# Altium PCB Краморенко.pcbdoc
Units mm, origin at the board's own origin, x right, y up, seen from the top; angles counter-clockwise.
Board outline 71 x 45 mm, 2 copper layers (Top Layer, Bottom Layer); 32 components, 17 nets, 128 pads, 8 vias.
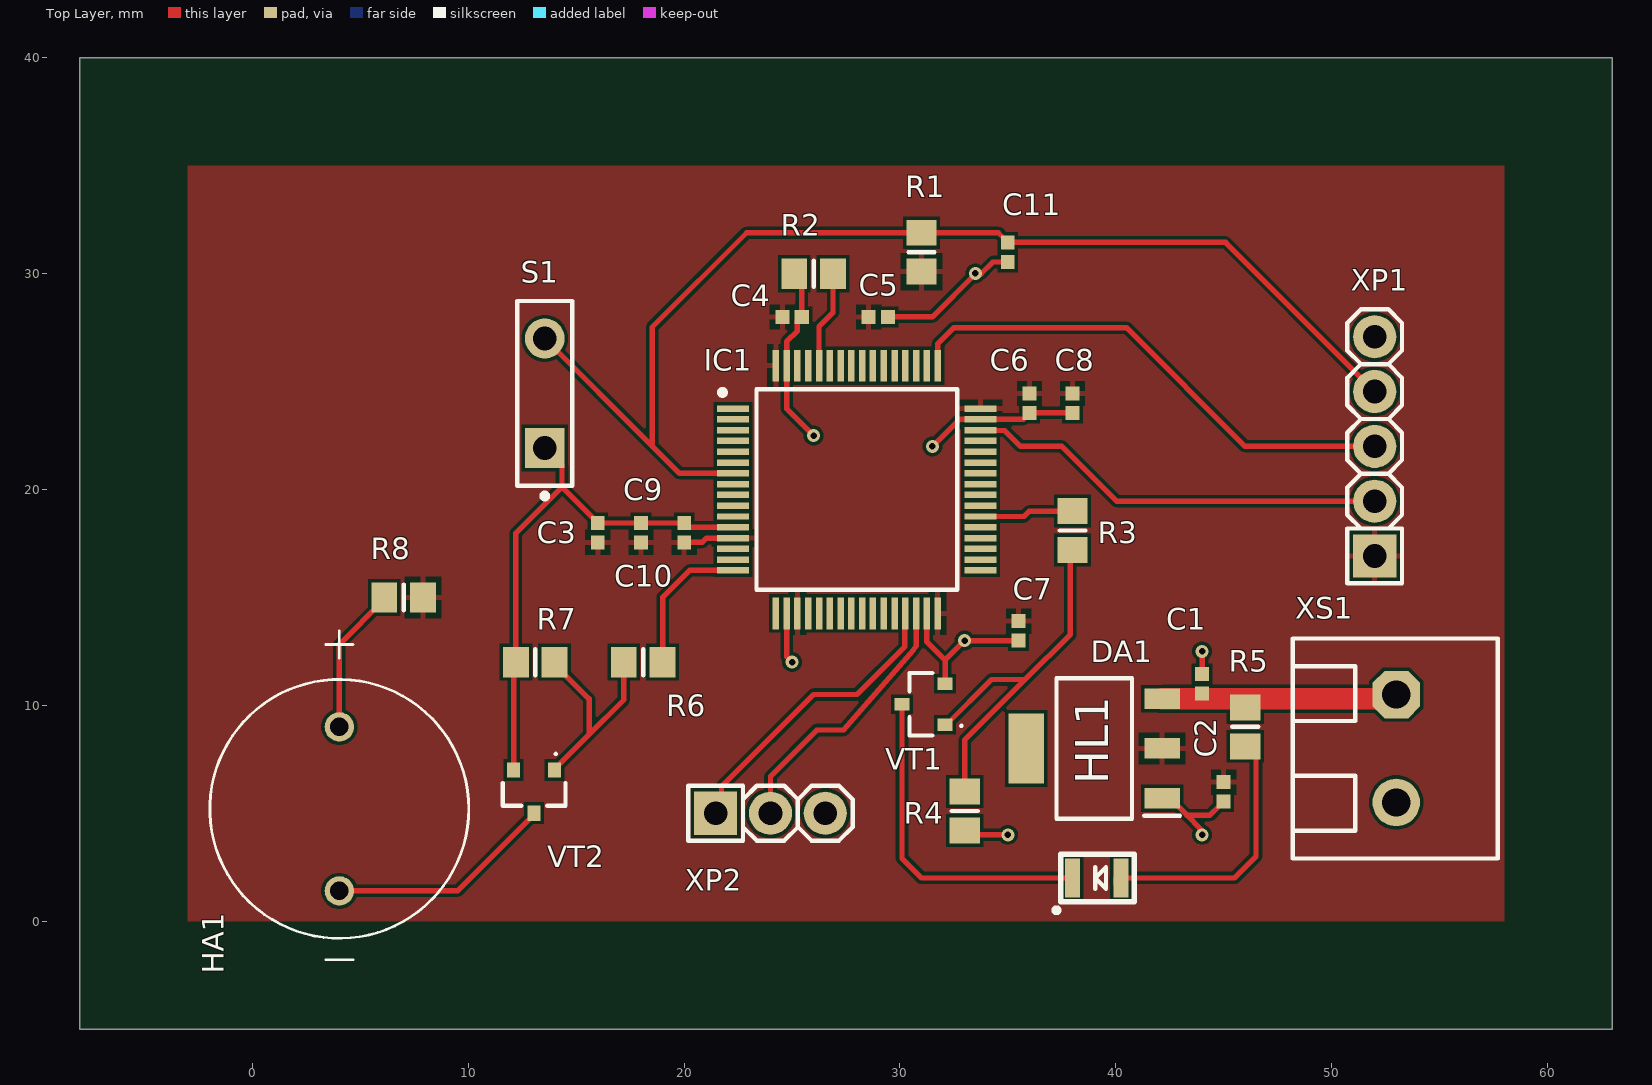
[diagram p0: Top Layer view]
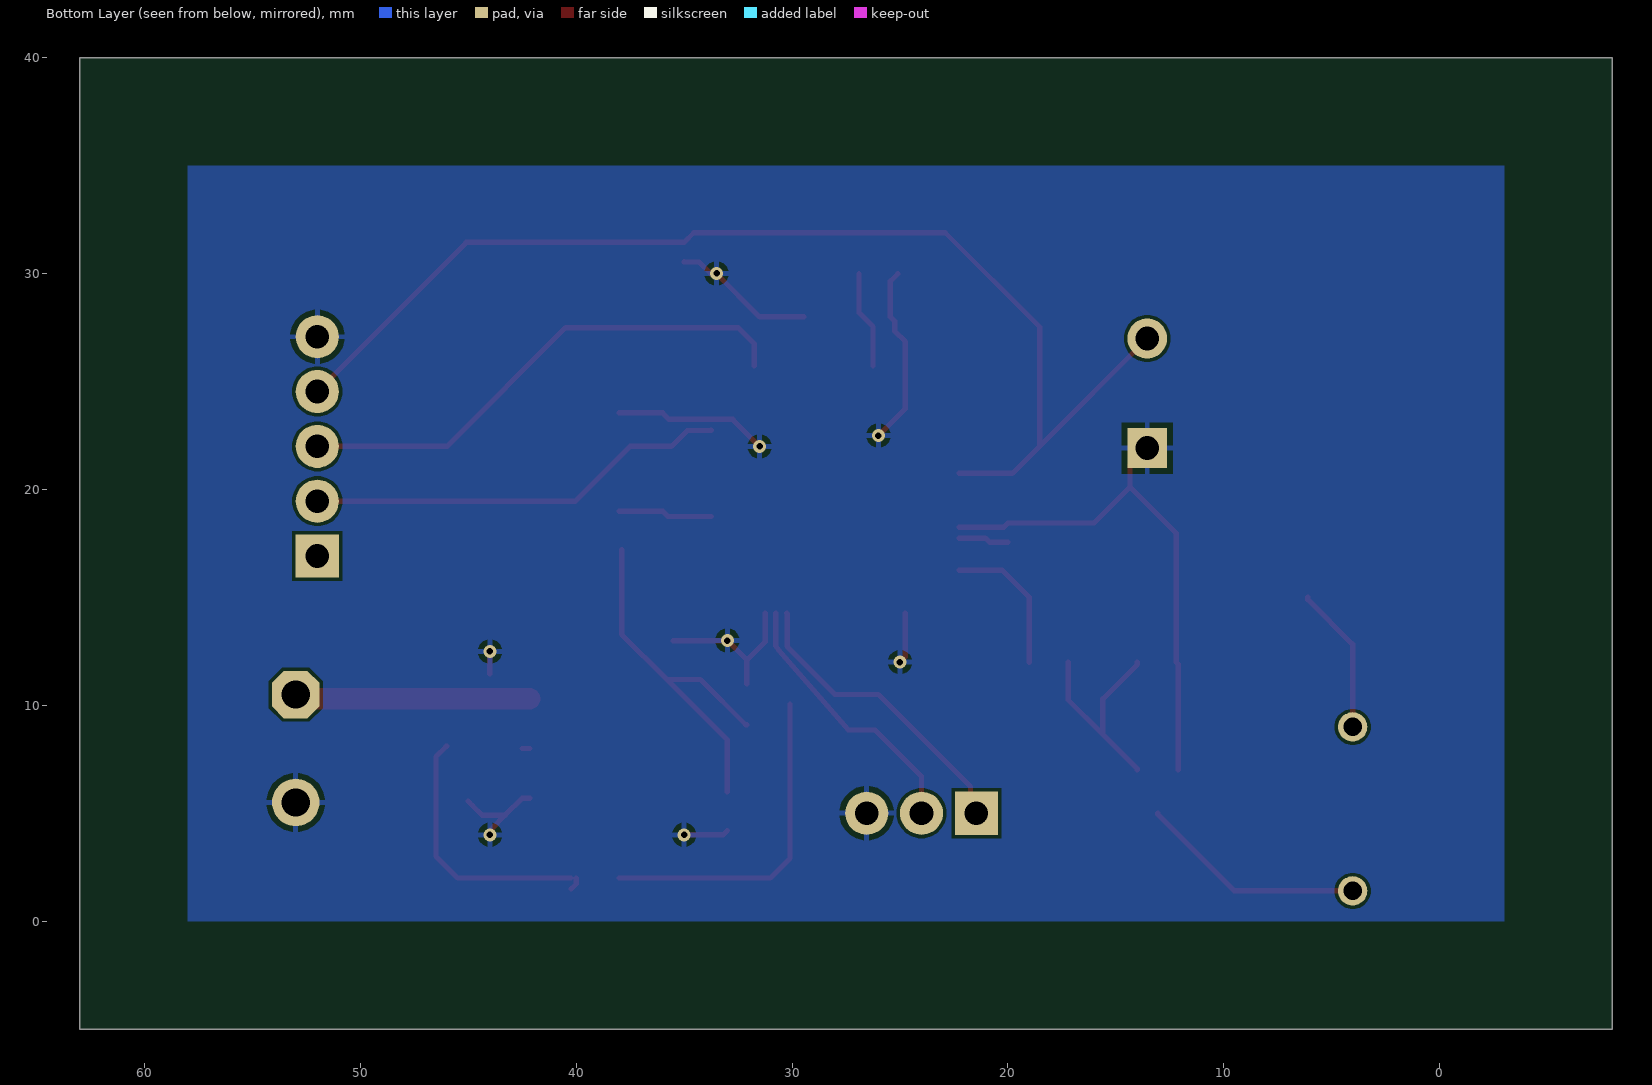
[diagram p1: Bottom Layer view, seen from below]

## Layer stack, top to bottom
Top Solder: solder mask 0.0102, Solder Resist, Dk 3.5
Top Layer: signal copper 0.0356
Dielectric 1: dielectric 0.32, FR-4, Dk 4.8
Bottom Layer: signal copper 0.0356
Bottom Solder: solder mask 0.0102, Solder Resist, Dk 3.5

## Board outline
-8,-5 -8,40 63,40 63,-5

## Design rules (kind name [scope] priority, off if disabled: settings)
Clearance [All] p1: gap=0.15 ignorepadtopadclearanceinfootprint=FALSE except(0: Arc-Hole Track-Hole SMDPad-Hole THPad-Hole Via-Hole Fill-Hole Poly-Hole Region-Hole Text-Hole)
DiffPairsRouting [All] p1: maxlimit=0.254 minlimit=0.15 mostfreqgap=0.15 toplayer_minwidth=0.15 toplayer_maxwidth=0.381 toplayer_prefwidth=0.15 bottomlayer_minwidth=0.15 bottomlayer_maxwidth=0.381 bottomlayer_prefwidth=0.15 maxuncoupledlength=12.7
MinimumSolderMaskSliver [All] p1: minsoldermaskwidth=0.15
PolygonConnect [All] p1: connectstyle=Relief reliefconductorwidth=0.254 reliefentries=4 polygonreliefangle="90 Angle" airgapwidth=0.254
RoutingVias [All] p1: holewidth=0.3 width=0.6 viastyle="Through Hole" minholewidth=0.3 minwidth=0.6 maxholewidth=0.3 maxwidth=0.6
SilkToSolderMaskClearance [IsText] p1: minsilkscreentomaskgap=0.254 clearancetoexposedcopper=TRUE
SolderMaskExpansion [All] p1: expansion=0.102 istentingtop=FALSE
Width [All] p1: maxlimit=1 minlimit=0.25 preferedwidth=0.25
27 further rules are at their usual default settings.

## Classes and differential pairs
component class kursach_6_sem: C1 C2 C3 C4 C5 C6 C7 C8 C9 C10 C11 DA1 HA1 HL1 IC1 R1 R2 R3 R4 R5 R6 R7 R8 S1 VT1 VT2 XP1 XP2 XS1

## Components (designator, comment, footprint, x,y, rotation, side; value= is the part's Value field where it differs from the comment)
C1 "100нФ" CAPC1005X56N 44,11 r90 top
C2 "10мкФ" CAPC1005X56N 45,5.996 r90 top
C3 "100нФ" CAPC1005X56N 16,18 r270 top
C4 "100нФ" CAPC1005X56N 25,28 r180 top
C5 "100нФ" CAPC1005X56N 29,28 r180 top
C6 "100нФ" CAPC1005X56N 36,24 r90 top
C7 "100нФ" CAPC1005X56N 35.499,13.45 r90 top
C8 "4.7мкФ" CAPC1005X56N 38,24 r90 top
C9 "10нФ" CAPC1005X56N 18,18 r90 top
C10 "1мкФ" CAPC1005X56N 20,18 r90 top
C11 "0.1мкФ" CAPC1005X56N 35,31 r90 top
DA1 "LD1117AS33TR" LD1117AS33TR 39.001,8 r180 top
HA1 "" XDCR_AI-1223-TWT-12V-R 4.021,5.2 r0 top
HL1 "LED_1206" LED_1206 40.25,2 r180 top
IC1 "STM32F103RBT6TR" STM32F103RBT6TR 28,20 r0 top
R1 "40k" "RES: 0805" 31,31 r90 top
R2 "40k" "RES: 0805" 26,30 r180 top
R3 "2.4k" "RES: 0805" 38,18.1 r270 top
R4 "40k" "RES: 0805" 33,5.1 r90 top
R5 "150" "RES: 0805" 46,9 r270 top
R6 "24k" "RES: 0805" 18.1,12 r0 top
R7 "8.2k" "RES: 0805" 13.1,12 r180 top
R8 "180" "RES: 0805" 7,15 r0 top
S1 "Button SW-SPST" SPST-2 13.54,24.46 r90 top
VT1 "BC847" BC847215 31.096,10.05 r90 top
VT2 "BC847,215" BC847215 13.05,6 r180 top
XP1 "Connector, 5pin, 2.54mm, 500VAC, 3A" "CON: PLS-5" 52,22 r90 top
XP2 "Connector, 3pin, 2.54mm, 500VAC, 3A" "CON: PLS-3" 24,5 r0 top
XS1 "Terminal connector, 2pin, 3.5mm, 300VAC, 10A" "CON: 0395430002 (5 mm)" 53,8 r270 top
ZBOAS157490157 "Слой 2" "BOASVIEWlayer:Bottom Layer:2:1:32:1" 0,2255 r0 top (schematic designator fewf)
ZBOAS157495669 "Слой 1" "BOASVIEWlayer:Top Layer:2:1:1:1" 0,2395 r0 top (schematic designator fewf)
ZBOAS856298622 "Comment" "BOASVIEWdrill:Таблица отверстий:0:0:0:0" 177.5,2470 r0 top

## Footprints (in the part's own frame and the unit in brackets; to place one, negate y for a bottom-side part, rotate by r counter-clockwise, add the part's x,y. Pads: shape width x height; smd on the part's side, far side on the other; paste and mask are expansions set on the pad)
BC847215 [mm]
  rect 0.6x0.7 smd: 1(-0.95,-1) 2(0.95,-1) 3(0,1)
  silkscreen extent -1.45,-1.8 1.45,0.65, body extent -1.45,-1.2 1.45,1.2, height 0.95
"BOASVIEWdrill:Таблица отверстий:0:0:0:0" [mm]
"BOASVIEWlayer:Bottom Layer:2:1:32:1" [mm]
"BOASVIEWlayer:Top Layer:2:1:1:1" [mm]
CAPC1005X56N [mm]
  rect 0.65x0.64 smd: 1(-0.45,0) 2(0.45,0)
  body extent -0.5,-0.25 0.5,0.25, height 0.56
"CON: 0395430002 (5 mm)" [mm] "2 pin 5.08mm screw connector"
  oct 2.2x2.2 hole 1.3: 1(-2.5,0)
  round 2.2 hole 1.3: 2(2.5,0)
  silkscreen extent -5.1,-4.8 5.1,4.7, body extent -5,-4.8 5,4.6, height 14.63
"CON: PLS-3" [mm]
  rect 2x2 hole 1.1: 1(-2.54,0)
  round 2 hole 1.1: 2(0,0) 3(2.54,0)
  silkscreen extent -3.81,-1.27 3.81,1.27, body extent -3.81,-1.27 3.81,1.27, height 8.54
"CON: PLS-5" [mm]
  rect 2x2 hole 1.1: 1(-5.08,0)
  round 2 hole 1.1: 2(-2.54,0) 3(0,0) 4(2.54,0) 5(5.08,0)
  silkscreen extent -6.35,-1.27 6.35,1.27, body extent -6.35,-1.27 6.35,1.27, height 8.54
LD1117AS33TR [mm]
  rect 1.65x0.95 smd: 1(-3.15,2.3) 2(-3.15,0) 3(-3.15,-2.3)
  rect 1.65x3.25 smd: 4(3.15,0)
  silkscreen extent -3.98,-3.25 1.75,3.25, body extent -3.5,-3.25 3.5,3.25, height 1.9
LED_1206 [mm]
  rect 0.7x1.8 smd: 1(0,0) 2(2.25,0)
  silkscreen extent -0.6,-1.1 3.1,1.6
"RES: 0805" [mm] "Chip Resistor, Body 2.0x1.2mm, IPC Medium Density"
  rect 1.2x1.4 smd: 1(-0.9,0) 2(0.9,0)
  silkscreen extent 0,-0.6 0,0.6, body extent -1.07,-0.7 1.07,0.7, height 0.7
SPST-2 [mm] "Switch; 2 Leads"
  rect 1.85x1.85 hole 1.1: 1(-2.54,0)
  round 1.85 hole 1.1: 2(2.54,0)
  silkscreen extent -4.89,-1.27 4.28,1.27
STM32F103RBT6TR [mm]
  rect 1.475x0.3 smd: 1(-5.738,3.75) 2(-5.738,3.25) 3(-5.738,2.75) 4(-5.738,2.25) 5(-5.738,1.75) 6(-5.738,1.25) 7(-5.738,0.75) 8(-5.738,0.25) 9(-5.738,-0.25) 10(-5.738,-0.75) 11(-5.738,-1.25) 12(-5.738,-1.75) 13(-5.738,-2.25) 14(-5.738,-2.75) 15(-5.738,-3.25) 16(-5.738,-3.75) 33(5.738,-3.75) 34(5.738,-3.25) 35(5.738,-2.75) 36(5.738,-2.25) 37(5.738,-1.75) 38(5.738,-1.25) 39(5.738,-0.75) 40(5.738,-0.25) 41(5.738,0.25) 42(5.738,0.75) 43(5.738,1.25) 44(5.738,1.75) 45(5.738,2.25) 46(5.738,2.75) 47(5.738,3.25) 48(5.738,3.75)
  rect 0.3x1.475 smd: 17(-3.75,-5.738) 18(-3.25,-5.738) 19(-2.75,-5.738) 20(-2.25,-5.738) 21(-1.75,-5.738) 22(-1.25,-5.738) 23(-0.75,-5.738) 24(-0.25,-5.738) 25(0.25,-5.738) 26(0.75,-5.738) 27(1.25,-5.738) 28(1.75,-5.738) 29(2.25,-5.738) 30(2.75,-5.738) 31(3.25,-5.738) 32(3.75,-5.738) 49(3.75,5.738) 50(3.25,5.738) 51(2.75,5.738) 52(2.25,5.738) 53(1.75,5.738) 54(1.25,5.738) 55(0.75,5.738) 56(0.25,5.738) 57(-0.25,5.738) 58(-0.75,5.738) 59(-1.25,5.738) 60(-1.75,5.738) 61(-2.25,5.738) 62(-2.75,5.738) 63(-3.25,5.738) 64(-3.75,5.738)
  silkscreen extent -6.35,-4.65 4.65,4.65, body extent -6,-6 6,6, height 1.6
XDCR_AI-1223-TWT-12V-R [mm]
  round 1.358 hole 0.85: N(0,-3.8) P(0,3.8)
  silkscreen extent -6,-6.98 6,8.25, body extent -6,-6 6,7.44, height 10.05

## Part data
C1 C2 C3 C4 C5 C6 C7 C8 C9 C10 C11: library part 0402YC104MAT2A, "Capacitor", Manufacturer_Name=AVX, Mouser Part Number=581-0402YC104MAT2A, Datasheet Link=http://www.mouser.com/catalog/supplier/library/pdf/AVXSurfaceMountCeramic.pdf, Height=0.56mm, Manufacturer_Part_Number=0402YC104MAT2A, Mouser Price/Stock=https://www.mouser.co.uk/ProductDetail/AVX/0402YC104MAT2A?qs=O2%2FeDh0sX9yiCaLwpXy1bw%3D%3D
DA1: "Power Supply", Manufacturer_Name=STMicroelectronics, Mouser Part Number=511-LD1117AS33, Arrow Part Number=LD1117AS33TR, Arrow Price/Stock=https://www.arrow.com/en/products/ld1117as33tr/stmicroelectronics?region=europe, Datasheet Link=https://4donline.ihs.com/images/VipMasterIC/IC/SGST/SGSTS49356/SGSTS49356-1.pdf?hkey=6D3A4C79FDBF58556ACFDE234799DDF0, Height=1.9mm, Manufacturer_Part_Number=LD1117AS33TR, Mouser Price/Stock=https://www.mouser.co.uk/ProductDetail/STMicroelectronics/LD1117AS33TR?qs=C3bf%2FVrkE5CoDDd7wyn%252BaQ%3D%3D
HA1: library part Buzzer
IC1: "Integrated Circuit", Manufacturer_Name=STMicroelectronics, Mouser Part Number=511-STM32F103RBT6TR, Arrow Part Number=STM32F103RBT6TR, Arrow Price/Stock=https://www.arrow.com/en/products/stm32f103rbt6tr/stmicroelectronics?region=nac, Datasheet Link=https://www.st.com/resource/en/datasheet/stm32f103c8.pdf, Height=1.6mm, Manufacturer_Part_Number=STM32F103RBT6TR, Mouser Price/Stock=https://www.mouser.co.uk/ProductDetail/STMicroelectronics/STM32F103RBT6TR?qs=5HwTSiuA5HDVUOusqeQ5hQ%3D%3D
R1 R2 R3 R4 R5 R6 R7 R8: library part "2. Resistor SMD"
S1: "Single-Pole, Single-Throw Switch", LatestRevisionDate=17-Jul-2002, LatestRevisionNote="Re-released for DXP Platform.", PackageDescription="Switch; 2 Leads", PackageReference=SPST-2, Published=24-Mar-1999, Publisher="Altium Limited"
VT1: library part BC847,215, "Transistor BJT NPN", Manufacturer_Name=Nexperia, Mouser Part Number=771-BC847215, Arrow Part Number=BC847,215, Arrow Price/Stock=https://www.arrow.com/en/products/bc847215/nexperia?region=nac, Datasheet Link=https://assets.nexperia.com/documents/data-sheet/BC847_SER.pdf, Height=1.1mm, Manufacturer_Part_Number=BC847,215, Mouser Price/Stock=https://www.mouser.co.uk/ProductDetail/Nexperia/BC847215?qs=me8TqzrmIYWROhdFmDauyQ%3D%3D
VT2: "Transistor BJT NPN", Manufacturer_Name=Nexperia, Mouser Part Number=771-BC847215, Arrow Part Number=BC847,215, Arrow Price/Stock=https://www.arrow.com/en/products/bc847215/nexperia?region=nac, Datasheet Link=https://assets.nexperia.com/documents/data-sheet/BC847_SER.pdf, Height=1.1mm, Manufacturer_Part_Number=BC847,215, Mouser Price/Stock=https://www.mouser.co.uk/ProductDetail/Nexperia/BC847215?qs=me8TqzrmIYWROhdFmDauyQ%3D%3D
XP1: library part PLS-5, CurrentMax=3A, Manufacturer=Connfly, VoltageMax=500VAC, CommentText="\"Разъем\"", HelpURL=https://www.chipdip.ru/product/pls-5, Multichannel=5pin, PartNumber=PLS-5, Pitch=2.54mm, TypeConnector=Connector, ValueManufacturerPartNumber="Connector, 5pin, 2.54mm, 500VAC, 3A"
XP2: library part PLS-3, CurrentMax=3A, Manufacturer=Connfly, VoltageMax=500VAC, CommentText="\"Разъем\"", HelpURL=https://www.chipdip.ru/product/pls-3, Multichannel=3pin, PartNumber=PLS-3, Pitch=2.54mm, TypeConnector=Connector, ValueManufacturerPartNumber="Connector, 3pin, 2.54mm, 500VAC, 3A"
XS1: library part 12.Connector_terminal_5.08mmx2pin, CurrentMax=10A, Manufacturer=Degson, PartNumber=DG350-3.5-02P-14, VoltageMax=300VAC, CommentText="\"Разъем\"", HelpURL=https://www.chipdip.ru/product/dg350-3.5-02p-12, Multichannel=2pin, Pitch=3.5mm, TypeConnector="Terminal connector", ValueManufacturerPartNumber="Terminal connector, 2pin, 3.5mm, 300VAC, 10A"

## Via types
v1: diameter 0.6, hole 0.3, Top Layer to Bottom Layer, 8 vias

## Nets (pads, with @x,y where several pads share a name; then routed paths per layer and width w, separated by ;. In a path a pad name is that pad's centre, name@x,y a point inside that pad or via, vN(x,y) a via of type N, cw(c..) or ccw(c..) an arc to the next point about the centre after c; other vN are vias at no path point)
+3.3: C2.2 C3.2 C4.2 C5.2 C6.2 C7.2 C8.2 C9.1 C10.1 DA1.2 IC1.13 IC1.19 IC1.32 IC1.48 IC1.64 R1.1 R8.2 XP1.1 | length 2.7
  Top Layer w0.25: C10.1 20.835,17.55 21.035,17.75 IC1.13 ; DA1.2 DA1.2@42.501,8
+5: C1.1 DA1.3 R5.1 XS1.1 | length 10.9
  Top Layer w0.25: XS1.1@52.8,10.3 XS1.1
  Top Layer w1: DA1.3 44,10.3 46,10.3 XS1.1@52.8,10.3
GND: C1.2 C2.1 C3.1 C4.1 C5.1 C6.1 C7.1 C8.1 C9.2 C10.2 C11.1 DA1.1 IC1.12 IC1.18 IC1.31 IC1.47 IC1.63 R2.2 R4.1 R7.2 S1.1 VT1.2 VT2.2 XP1.5 XP2.3 XS1.2 | length 64.6
  Top Layer w0.25: VT2.2 12.1,11.9 R7.2 12.2,17.975 14.34,20.115 ; S1.1 14.34,21.12 14.34,20.115 ; IC1.12 20.195,18.25 20,18.445 C10.2 C9.2 C3.1 16,18.455 14.34,20.115 ; IC1.18 24.75,12.25 v1(25,12) ; R2.2 25.45,29.65 C4.1 ; C4.1@25.445,28 25.25,27.805 25.25,27.351 24.75,26.851 IC1.63 24.75,23.75 v1(26,22.5) ; C5.1 31.5,28 v1@33.5,30 ; IC1.31 31.25,12.941 32.096,12.096 ; v1(31.5,22) 32.75,23.25 IC1.47 35.705,23.25 36,23.545 C6.1 C8.1 ; VT1.2 32.096,12.096 ; R4.1 33.2,4 v1(35,4) ; v1(33.5,30.014) v1@33.5,30 ; C11.1 34.995,30.545 34.305,30.545 33.76,30 v1@33.5,30 ; C7.1 v1(33,13) 32.096,12.096 ; DA1.1 42.501,5.7 43.294,4.907 ; v1(44,4) 43.933,4.067 43.933,4.268 43.294,4.907 ; C1.2 v1(44,12.5) ; C2.1 45,5.541 44.805,5.346 44.8,5.346 44.361,4.907 43.294,4.907
NetC11_2: C11.2 IC1.7 R1.2 S1.2 XP1.4 | length 55.2
  Top Layer w0.25: S1.2 18.52,22.02 ; IC1.7 19.79,20.75 18.52,22.02 ; XP1.4 45.09,31.45 C11.2 35,31.455 34.555,31.9 R1.2 22.9,31.9 18.52,27.52 18.52,22.02
NetHA1_N: HA1.N VT2.3 | length 10.5
  Top Layer w0.25: HA1.N 9.5,1.4 13.05,4.95 VT2.3
NetHA1_P: HA1.P R8.1 | length 6.9
  Top Layer w0.25: HA1.P 4.021,12.821 6.1,14.9 R8.1
NetHL1_1: HL1.1 R5.2 | length 12.6
  Top Layer w0.25: HL1.1@40,2 40,1.725 HL1.1@40.225,1.5 ; HL1.1 45.5,2 46.5,3 46.5,7.625 46.025,8.1 R5.2
NetHL1_2: HL1.2 VT1.3 | length 15.4
  Top Layer w0.25: VT1.3 30.096,2.904 31,2 HL1.2
NetIC1_16: IC1.16 R6.2 | length 6.8
  Top Layer w0.25: R6.2 19,15 20.25,16.25 IC1.16
NetIC1_29: IC1.29 XP2.1 | length 14.1
  Top Layer w0.25: XP2.1 21.729,5.269 21.729,6.229 26,10.5 28,10.5 30.225,12.725 30.225,14.237 IC1.29
NetIC1_30: IC1.30 XP2.2 | length 12.6
  Top Layer w0.25: XP2.2 24,6.708 26.146,8.854 27.387,8.854 30.625,12.559 30.75,12.75 IC1.30
NetIC1_38: IC1.38 R3.1 | length 4.4
  Top Layer w0.25: IC1.38 35.75,18.75 36,19 R3.1
NetIC1_46: IC1.46 XP1.2 | length 19.6
  Top Layer w0.25: IC1.46 33.752,22.736 34.85,22.736 35.587,22 37.5,22 40.04,19.46 XP1.2
NetIC1_49: IC1.49 XP1.3 | length 23.9
  Top Layer w0.25: IC1.49 31.75,26.75 32.5,27.5 40.5,27.5 46,22 XP1.3
NetIC1_60: IC1.60 R2.1 | length 4.5
  Top Layer w0.25: IC1.60 26.25,27.55 26.9,28.2 R2.1
NetR3_2: R3.2 R4.2 VT1.1 | length 17.8
  Top Layer w0.25: VT1.1 32.146,9.1 34.241,11.195 35.805,11.195 ; R4.2 33,8.39 35.805,11.195 ; R3.2@37.9,17.2 37.9,13.29 35.805,11.195
NetR6_1: R6.1 R7.1 VT2.1 | length 10.3
  Top Layer w0.25: VT2.1 14,7.05 15.6,8.65 ; R7.1 14,11.9 15.6,10.3 15.6,8.65 ; R6.1 17.2,10.25 15.6,8.65
pads on no net: DA1.4 IC1.1 IC1.2 IC1.3 IC1.4 IC1.5 IC1.6 IC1.8 IC1.9 IC1.10 IC1.11 IC1.14 IC1.15 IC1.17 IC1.20 IC1.21 IC1.22 IC1.23 IC1.24 IC1.25 IC1.26 IC1.27 IC1.28 IC1.33 IC1.34 IC1.35 IC1.36 IC1.37 IC1.39 IC1.40 IC1.41 IC1.42 IC1.43 IC1.44 IC1.45 IC1.50 IC1.51 IC1.52 IC1.53 IC1.54 IC1.55 IC1.56 IC1.57 IC1.58 IC1.59 IC1.61 IC1.62

## Polygon pours and split planes (outlines as drawn)
GND on Bottom Layer "GND_L02_P003" (solid, pour order 3): -3,35 58,35 58,0 -3,0
+3.3 on Top Layer "+3.3_L01_P005" (solid, pour order 5): -3,35 58,35 58,0 -3,0

## Silkscreen, mask and mechanical layers (free items; w line width, h text height)
Mechanical 1:
  the board outline again, w0.254
Mechanical 7:
  text "BOASFORMAT|А3|1|0|883070867|165354330|1000000000|2:1|" at -40,2505 h0
  text "DimH|-47244094|0|62992126|984251969|-23622047|3937008|2||||js12|False|False|False|False" at 120,2465 h0
  text "DimV|0|-27559055|62992126|929133859|3937008|-13779528|2||||js12|False|False|False|False" at 120,2325 h0
  text "МГТУ им. Н.Э.Баумана" at 333.128,2223.758 h4.5
  text "Кафедра ИУ4" at 340.456,2218.873 h4.5
  text "Группа ИУ4-61Б" at 338.339,2214.639 h4.5
  text "SET2|Superlayer=MechanicalLayer7|Wsuperlayer=MechanicalLayer8|Layergrid=MechanicalLayer9|Werase=MechanicalLayer11|Layermark=MechanicalLayer12|Layerstamp=MechanicalLayer13|Thinline=0,18|Basicline=0,6|Gridline=0,18|Boardline=0,6|Contourpolygonline=0,6|PcbGridStep=2,5|PcbGridCleareanceAtView=0|PcbGridNumberEach=l2|PcbGridLineEach=l2|PcbGridCountSecondaryStrip=1|PcbGridEnabledStrip=True|PcbGridHorizontal90=False|PcbGridWhiteAreaBeforeText=True|PcbSignalGridEnabled=True|PcbSignalShowBukva=True|RealSignalLayerNames=False|PcbGridEnabledBothSide=False|PcbPolarGridEnabled=False|PcbPolarGridAngleStep=10|PcbPolarGridRadialStep=10|PcbPolarGridCenterPcbGrid=False|SilkShowPad=True|SilkViewName=Слой маркировки|SilkShowHole=True|SilkShowAxis=True|SilkShowBukva=True|SilkShowGrid=False|SolderShowGrid=False|SolderViewName=Слой маски|SolderShowAxis=False|SolderShowBukva=False|MainViewShowGrid=False|MainViewUseShapesDrill=False|ShowBukvaOnSboky=True|ShowBukvaViews=True|Density=2,2|CustomHoleSizeFactor=1|TableName=|RazrezWidth=100|RealLayerNames=False|RazrezShowBukva=False|RazrezBukva=В-В|Sher=Ra 12,5|Asstoplayer=MechanicalLayer1|Asstoplayer2=None|Assbottomlayer=MechanicalLayer2|Assbottomlayer2=None|AssMinDiameterHoles=2|AssDim=False|AssMech=False|AssSilk=False|AssComponentSilk=False|AssFreeSilk=False|AssSmdPads=False|AssGridEnable=False|Mirror=Horisontal|PcbGridFontSize=5|PcbGridCenterZero=False|TTStampDistance=12|MainFontSize=5|PolyShtrihEnable=True|RegionShtrihEnable=False|PolyStep=2|PcbDrillDrawingGridEnabled=False|PcbDrillDrawingViewName=Слой сверловки|PcbDrillDrawingShowBukva=False|PcbDrillDrawingShowAxis=False|PcbSignalLayersUseDrill=False|PcbSignalLayersUseShapesDrill=False|PcbSignalLayersShowAxis=False" at -40,-34.975 h0
  text "TT0012#11. Остальные технические требования по ОСТ 4Г О.070.014-75" at -40,-35 h0
  text "TT0011#10. Контроль оптико-визуальным методом при 16-ти кратном увеличении по ГОСТ 23752.1-92." at -40,-35 h0
  text "TT0010#9. Контроль функциональный ручным способом методом прозвонки по ГОСТ 23752.1-92." at -40,-35 h0
  text "TT0009#8. Промывка по ГОСТ Р 70798-2023 изопропиловым спиртом ГОСТ 9805-84." at -40,-35 h0
  text "TT0008#7. Финишное покрытие металлизированных поверхностей меди по ГОСТ 9.301-86 толщиной не менее 250 мкм c флюсом ЛТИ-120 ГОСТ 19250-73 и припоем ПОС-61 ГОСТ 21930-76." at -40,-35 h0
  text "TT0007#группа жесткости - 1." at -40,-35 h0
  text "TT0006#6. Плата должна соответствовать ГОСТ 23752-79," at -40,-35 h0
  text "TT0005#5. Параметры отверстий платы приведены в таблице." at -40,-35 h0
  text "TT0004#4. Класс точности платы - 1 по ГОСТ Р 53429-2009." at -40,-35 h0
  text "TT0003#3. Плату изготовить химическим негативным методом." at -40,-35 h0
  text "TT0002#2. Шаг координатной сетки 2,5 мм ГОСТ 10317-79." at -40,-35 h0
  text "TT0001#1. Общие допуски формы и расположения - ГОСТ 30893.2-2002 - H." at -40,-35 h0
  text "TT0000#*Размеры для справок" at -40,-35 h0
  text "STAMP|Разработал|Краморенко А.К." at -40,-35 h0
  text "STAMP|Проверил|Гладких А.А." at -40,-35 h0
  text "STAMP|Техконтроль|" at -40,-35 h0
  text "STAMP|Начальник отдела|" at -40,-35 h0
  text "STAMP|Нормоконтроль|" at -40,-35 h0
  text "STAMP|Утвердил|" at -40,-35 h0
  text "STAMP|Var|" at -40,-35 h0
  text "STAMP|Tech|Т.контр." at -40,-35 h0
  text "STAMP|Normo|Н.контр." at -40,-35 h0
  text "STAMP|Check|Пров." at -40,-35 h0
  text "STAMP|Design|Разраб." at -40,-35 h0
  text "STAMP|Utv|Утв." at -40,-35 h0
  text "STAMP|Обозначение|ИУ4 11.03.03.24.06.61.10.002" at -40,-35 h0
  text "STAMP|Первичная применяемость|ИУ4 11.03.03.24.06.61.10.001" at -40,-35 h0
  text "STAMP|Компания1|" at -40,-35 h0
  text "STAMP|Наименование1|" at -40,-35 h0
  text "STAMP|ТипДокумента|Плата печатная" at -40,-35 h0
  text "STAMP|Материал1|СФ 2Н 35Г ГОСТ 10316 78" at -40,-35 h0
  text "STAMP|Материал2|" at -40,-35 h0
  text "STAMP|Масса|" at -40,-35 h0
  text "STAMP|Lit|" at -40,-35 h0
  text "STAMP|Наименование2|Устройство преобразования данных с UART в азбуку Морзе" at -40,-35 h0
  text "STAMP|Компания2|" at -40,-35 h0
  text "BOASVIADRILLTABLE:none,280000,5," at -40,-35 h0
  text "2BOASDRILLTABLE:none,334646,Да,2,True,|none,433071,Да,10,True,|none,511811,Да,2,True," at -40,-35 h0
Mechanical 8:
  region: 130.092,2255.092 130.739,2256.785 131.23,2260.499 130.096,2260.5 130.095,2259.568 130.658,2260 130.003,2255.093
  region: 129.908,2255.092 129.261,2256.785 128.77,2260.499 129.904,2260.5 129.905,2259.568 129.342,2260 129.997,2255.093
  region: 129.908,2324.908 129.261,2323.215 128.77,2319.501 129.904,2319.5 129.905,2320.432 129.342,2320 129.997,2324.907
  region: 130.092,2324.908 130.739,2323.215 131.23,2319.501 130.096,2319.5 130.095,2320.432 130.658,2320 130.003,2324.907
  region: 119.908,2475.092 118.215,2475.739 114.501,2476.23 114.5,2475.096 115.432,2475.095 115,2475.658 119.907,2475.003
  region: 119.908,2474.908 118.215,2474.261 114.501,2473.77 114.5,2474.904 115.432,2474.905 115,2474.342 119.907,2474.997
  region: 0.092,2474.908 1.785,2474.261 5.499,2473.77 5.5,2474.904 4.568,2474.905 5,2474.342 0.093,2474.997
  region: 0.092,2475.092 1.785,2475.739 5.499,2476.23 5.5,2475.096 4.568,2475.095 5,2475.658 0.093,2475.003
Mechanical 9:
  region: 130,2255 129.342,2260 130,2259.5 130.658,2260
  region: 130,2325 130.658,2320 130,2320.5 129.342,2320
  region: 120,2475 115,2474.342 115.5,2475 115,2475.658
  region: 0,2475 5,2475.658 4.5,2475 5,2474.342
  lines w0.18: 0,2465 0,2476 ; 0,2475 120,2475 ; 120,2255 131,2255 ; 120,2325 131,2325 ; 120,2465 120,2476 ; 130,2255 130,2325
  text "60" at 56.948,2477.53 h7.68
  text "35" at 127.47,2286.783 h7.68 r90
Mechanical 13:
  lines w0.18: 190,2218 255,2218 ; 190,2223 255,2223 ; 190,2228 255,2228 ; 190,2233 255,2233 ; 190,2238 255,2238 ; 190,2253 255,2253 ; 190,2258 255,2258 ; 190,2263 255,2263 ; 329.96,2233 329.96,2248 ; 334.98,2233 334.98,2248 ; 351.7,2487.1 354.8,2481.7 360.4,2491.5 ; -40,2208 380,2208 380,2505 -40,2505 -40,2208
  lines w0.6: -32,2238 -20,2238 ; -32,2273 -20,2273 ; -32,2298 -20,2298 ; -32,2323 -20,2323 ; -32,2440 -20,2440 ; -27,2213 -27,2358 ; -27,2380 -27,2500 ; -20,2358 -32,2358 -32,2213 -20,2213 ; -20,2380 -32,2380 -32,2500 -20,2500 ; -20,2486 50,2486 50,2500 ; 190,2213 190,2268 375,2268 ; 190,2243 255,2243 ; 190,2248 255,2248 ; 197,2243 197,2268 ; 207,2213 207,2268 ; 230,2213 230,2268 ; 245,2213 245,2268 ; 255,2213 255,2268 375,2268 ; 255,2228 325,2228 375,2228 ; 255,2253 375,2253 ; 312,2489 317,2480 324.6,2494 ; 324.7,2494 367,2494 ; 325,2213 325,2253 ; 325,2233 375,2233 ; 325,2248 340,2248 375,2248 ; 340,2233 340,2253 ; 345.57,2228 345.57,2233 ; 357,2233 357,2253 ; 375,2276 375,2268 ; -20,2213 375,2213 375,2500 -20,2500 ; -20,2213 -20,2500
  text "ИУ4 11.03.03.24.06.61.10.002" at 49.505,2495.079 h7.09 r180
  text "Ra 12,5" at 324.7,2481.7 h10.75
  text "(" at 348,2481.7 h10.75
  text ")" at 359,2481.7 h10.75
  text "Перв. примен." at -27.922,2457.022 h5.38 r90
  text "ИУ4 11.03.03.24.06.61.10.001" at -21.922,2444.075 h5.38 r90
  text "Справ. №" at -27.922,2400.714 h5.38 r90
  text "Подп. и дата" at -27.922,2328.049 h5.38 r90
  text "Инв. № дубл." at -27.922,2298.616 h5.38 r90
  text "*Размеры для справок / 1. Общие допуски формы и расположения - ГОСТ 30893.2-2002 - H. / 2. Шаг координатной сетки 2,5 мм ГОСТ 10317-79. / 3. Плату изготовить химическим негативным методом. / 4. Класс точности платы - 1 по ГОСТ Р 53429-2009. / 5. Параметры отверстий платы приведены в таблице. / 6. Плата должна соответствовать ГОСТ 23752-79, / группа жесткости - 1. / 7. Финишное покрытие металлизированных поверхностей меди по ГОСТ 9.301-86 толщиной не менее 250 мкм c флюсом ЛТИ-120 ГОСТ 19250-73 и припоем ПОС-61 ГОСТ 21930-76. / 8. Промывка по ГОСТ Р 70798-2023 изопропиловым спиртом ГОСТ 9805-84. / 9. Контроль функциональный ручным способом методом прозвонки по ГОСТ 23752.1-92. / 10. Контроль оптико-визуальным методом при 16-ти кратном увеличении по ГОСТ 23752.1-92. / 11. Остальные технические требования по ОСТ 4Г О.070.014-75" at 195,2288 h7.68
  text "Взам. инв. №" at -27.922,2273.573 h5.38 r90
  text "ИУ4 11.03.03.24.06.61.10.002" at 277.607,2258.247 h7.68
  text "Лит." at 328.4,2248.922 h5.38
  text "Масса" at 342.943,2248.922 h5.38
  text "Масштаб" at 357.054,2248.922 h5.38
  text "Изм." at 189.646,2243.922 h5.38
  text "Лист" at 197.23,2243.922 h5.38
  text "№ докум." at 210.182,2243.922 h5.38
  text "Подп." at 232.581,2243.922 h5.38
  text "Дата" at 244.616,2243.922 h5.38
  text "Подп. и дата" at -27.922,2243.549 h5.38 r90
  text "Устройство преобразования данных с UART в азбуку Морзе" at 255.502,2239.082 h3.13
  text "Разраб." at 190.533,2238.771 h5.38
  text "Краморенко А.К." at 207.68,2238.771 h3.71
  text "2:1" at 362.431,2238.247 h7.68
  text "Пров." at 190.533,2233.771 h5.38
  text "Гладких А.А." at 207.68,2233.771 h4.8
  text "Плата печатная" at 273.194,2230.422 h5.38
  text "Т.контр." at 190.533,2228.771 h5.38
  text "Лист" at 326.442,2228.771 h5.38
  text "Листов" at 347.485,2228.771 h5.38
  text "1" at 367.433,2228.771 h5.38
  text "СФ 2Н 35Г ГОСТ 10316 78" at 266.471,2218.922 h5.38
  text "Н.контр." at 190.533,2218.771 h5.36
  text "Утв." at 190.533,2213.771 h5.38
  text "Инв. № подл." at -27.922,2213.616 h5.38 r90
  text "Копировал" at 265.533,2208.771 h5.38
  text "Формат А3" at 344.043,2208.771 h5.38

## Text inside footprints (layer, text, board x,y; h text height)
ZBOAS157490157: Mechanical 7 "24" at 116.855,2243.547 h7.68; Mechanical 7 "22" at 106.765,2243.547 h7.68; Mechanical 7 "20" at 96.843,2243.547 h7.68; Mechanical 7 "18" at 87.657,2243.547 h7.68; Mechanical 7 "16" at 77.792,2243.547 h7.68; Mechanical 7 "14" at 67.747,2243.547 h7.68; Mechanical 7 "12" at 57.657,2243.547 h7.68; Mechanical 7 "10" at 47.736,2243.547 h7.68; Mechanical 7 "8" at 38.5,2243.547 h7.68; Mechanical 7 "6" at 28.639,2243.547 h7.68; Mechanical 7 "4" at 18.609,2243.547 h7.68; Mechanical 7 "2" at 8.399,2243.547 h7.68; Mechanical 7 "0" at -1.338,2243.547 h7.68; Mechanical 7 "14" at -8.506,2322.747 h7.68; Mechanical 7 "12" at -8.686,2312.747 h7.68; Mechanical 7 "10" at -8.529,2302.747 h7.68; Mechanical 7 "8" at -6.999,2292.747 h7.68; Mechanical 7 "6" at -6.722,2282.747 h7.68; Mechanical 7 "4" at -6.782,2272.747 h7.68; Mechanical 7 "2" at -7.202,2262.747 h7.68; Mechanical 7 "0" at -6.677,2252.747 h7.68
ZBOAS157495669: Mechanical 7 "24" at 116.855,2383.547 h7.68; Mechanical 7 "22" at 106.765,2383.547 h7.68; Mechanical 7 "20" at 96.843,2383.547 h7.68; Mechanical 7 "18" at 87.657,2383.547 h7.68; Mechanical 7 "16" at 77.792,2383.547 h7.68; Mechanical 7 "14" at 67.747,2383.547 h7.68; Mechanical 7 "12" at 57.657,2383.547 h7.68; Mechanical 7 "10" at 47.736,2383.547 h7.68; Mechanical 7 "8" at 38.5,2383.547 h7.68; Mechanical 7 "6" at 28.639,2383.547 h7.68; Mechanical 7 "4" at 18.609,2383.547 h7.68; Mechanical 7 "2" at 8.399,2383.547 h7.68; Mechanical 7 "0" at -1.338,2383.547 h7.68; Mechanical 7 "14" at -8.506,2462.747 h7.68; Mechanical 7 "12" at -8.686,2452.747 h7.68; Mechanical 7 "10" at -8.529,2442.747 h7.68; Mechanical 7 "8" at -6.999,2432.747 h7.68; Mechanical 7 "6" at -6.722,2422.747 h7.68; Mechanical 7 "4" at -6.782,2412.747 h7.68; Mechanical 7 "2" at -7.202,2402.747 h7.68; Mechanical 7 "0" at -6.677,2392.747 h7.68
ZBOAS856298622: Mechanical 12 "2,2" at 277.128,2424.747 h7.68; Mechanical 12 "Да" at 322.196,2424.747 h7.68; Mechanical 12 "1,3" at 233.953,2424.747 h7.68; Mechanical 12 "2" at 356.595,2424.747 h7.68; Mechanical 12 "2,0" at 277.207,2432.747 h7.68; Mechanical 12 "Да" at 322.196,2432.747 h7.68; Mechanical 12 "1,1" at 234.317,2432.747 h7.68; Mechanical 12 "10" at 355.931,2432.747 h7.68; Mechanical 12 "1,4" at 278.11,2440.747 h7.68; Mechanical 12 "Да" at 322.196,2440.747 h7.68; Mechanical 12 "0,85" at 231.625,2440.747 h7.68; Mechanical 12 "2" at 356.595,2440.747 h7.68; Mechanical 12 "1,3" at 278.024,2448.747 h7.68; Mechanical 12 "Да" at 322.196,2448.747 h7.68; Mechanical 12 "0,71" at 231.974,2448.747 h7.68; Mechanical 12 "5" at 356.614,2448.747 h7.68; Mechanical 12 "отв." at 352.677,2456.497 h7.68; Mechanical 12 "Кол." at 352.805,2463.997 h7.68; Mechanical 12 "металлизации" at 305.141,2456.497 h7.68; Mechanical 12 "Наличие" at 314.229,2463.997 h7.68; Mechanical 12 "площадки, мм" at 261.967,2456.497 h7.68; Mechanical 12 "Диаметр конт." at 260.22,2463.997 h7.68; Mechanical 12 "мм" at 233.492,2456.497 h7.68; Mechanical 12 "Диаметр отв.," at 217,2463.997 h7.68; Mechanical 12 "отв." at 190.981,2456.497 h7.68; Mechanical 12 "Обозначение" at 178.523,2463.997 h7.68